# Altium PCB EFPR-HPTECH_V1.2.PcbDoc
Units mm, origin at the board's own origin, x right, y up, seen from the top; angles counter-clockwise.
Board outline 48 x 20 mm, 2 copper layers (Top Layer, Bottom Layer), stack 1.671 mm thick; 22 components, 14 nets, 79 pads, 26 vias.
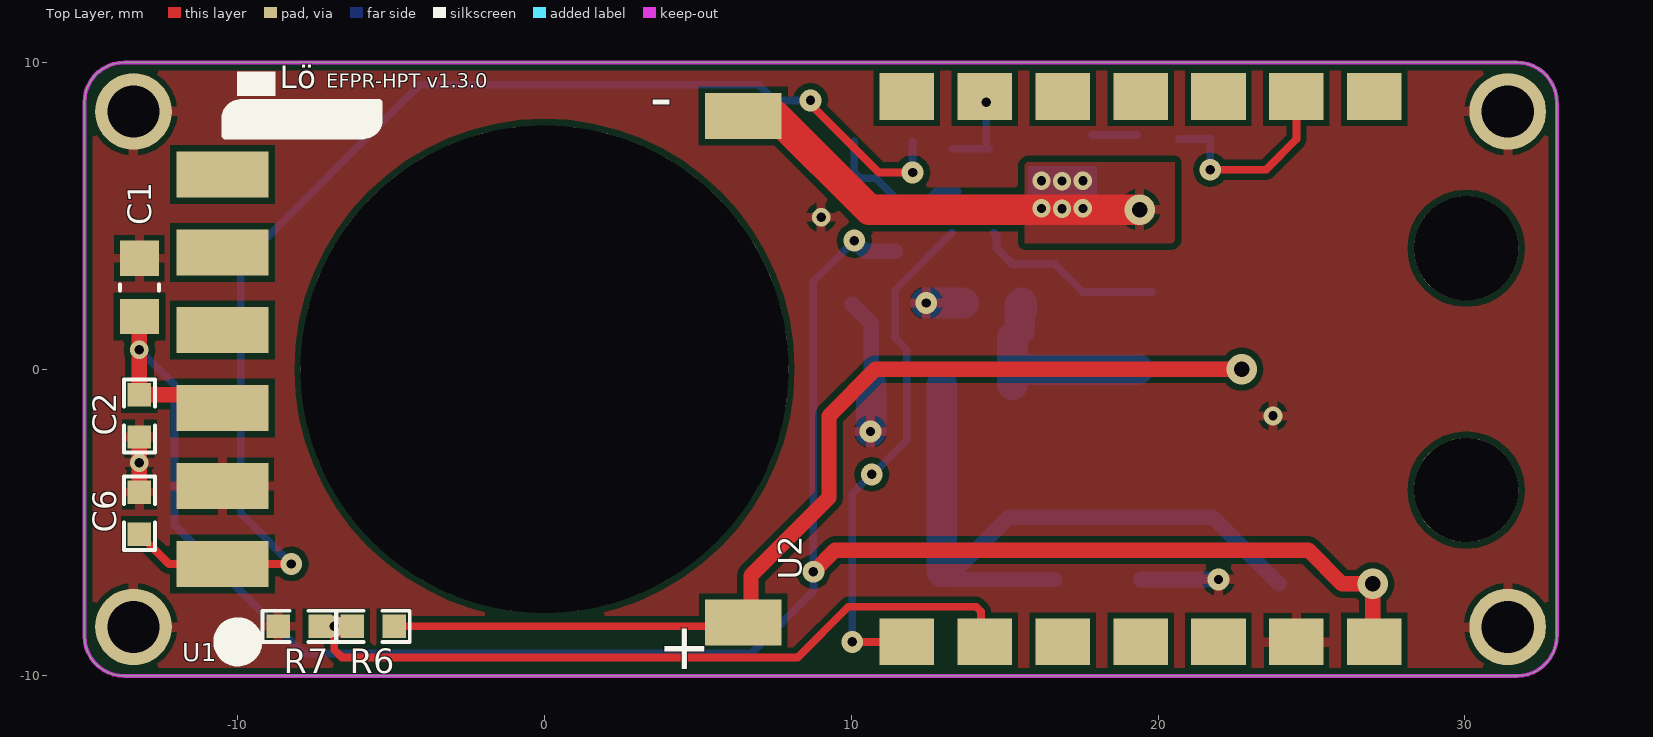
[diagram p0: Top Layer view]
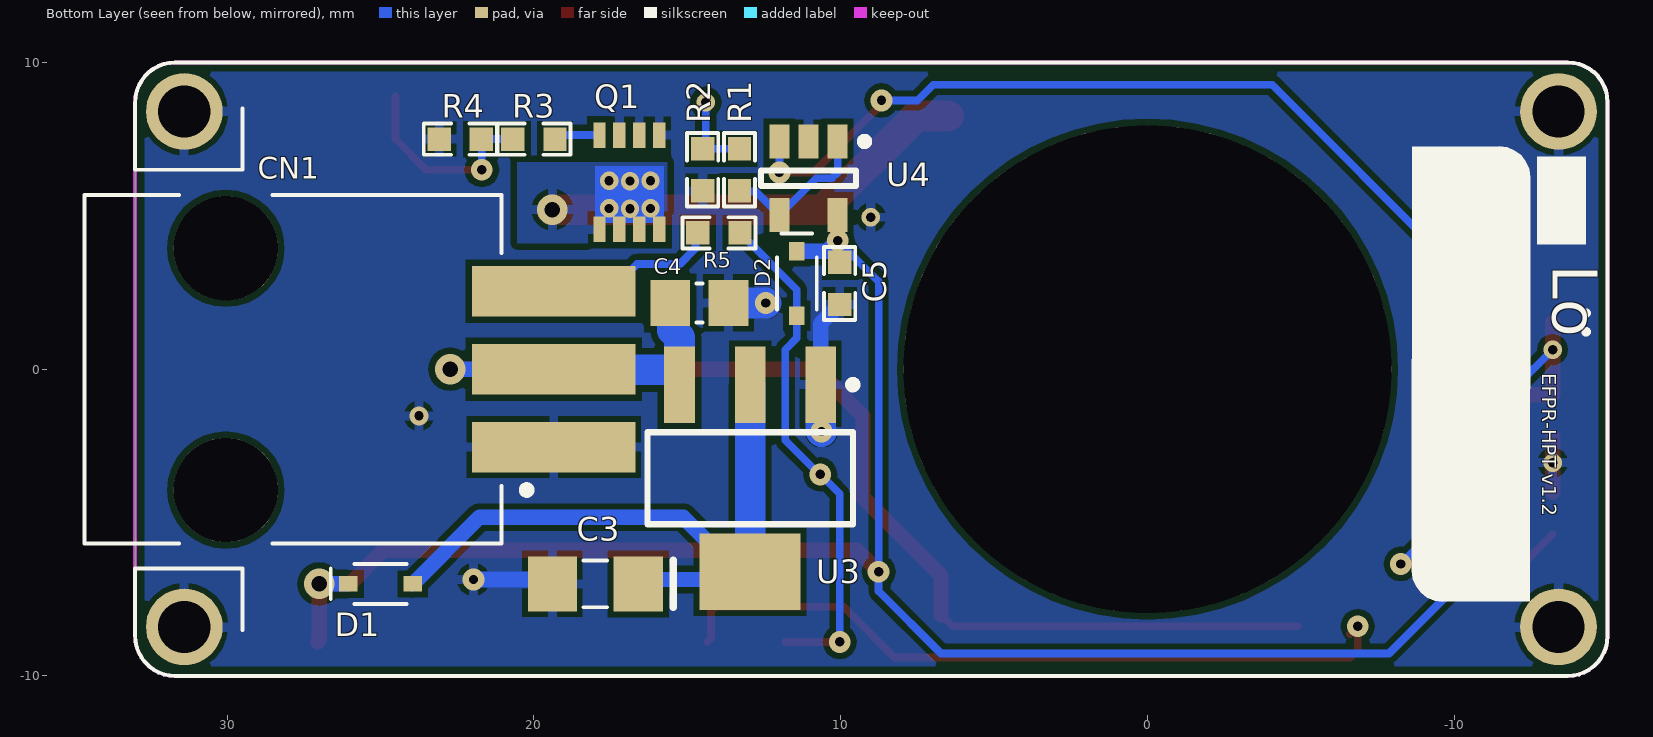
[diagram p1: Bottom Layer view, seen from below]

## Layer stack, top to bottom
Top Solder: solder mask 0.0102, Solder Resist, Dk 3.5
Top Layer: signal copper 0.0356
Dielectric1: core 1.6, FR-4, Dk 4.8
Bottom Layer: signal copper 0.0356
Bottom Solder: solder mask 0.0102, Solder Resist, Dk 3.5

## Board outline
-15,-8.7 -15,8.7 cw(c-13.7,8.7) -13.7,10 31.7,10 cw(c31.7,8.7) 33,8.7 33,-8.7 cw(c31.7,-8.7) 31.7,-10 -13.7,-10 cw(c-13.7,-8.7)

## Design rules (kind name [scope] priority, off if disabled: settings)
AssemblyTestPointUsage AssemblyTestPointUsage_1 [All] p2:
AssemblyTestpoint AssemblyTestpoint_1 [All] p2: testpointundercomponent=TRUE minsize=1.016 maxsize=2.54 preferedsize=1.524 minholesize=0 maxholesize=1.016 preferedholesize=0.813 testpointgrid=0.025 usegrid=TRUE gridtolerance=0 allowsidetop=TRUE allowsidebottom=TRUE
Clearance [All] p1: gap=0.254 ignorepadtopadclearanceinfootprint=FALSE except(0: Arc-Hole Track-Hole SMDPad-Hole THPad-Hole Via-Hole Fill-Hole Poly-Hole Region-Hole Text-Hole)
Clearance Clearance_1 [All] p2: gap=0.203 ignorepadtopadclearanceinfootprint=FALSE except(0: Arc-Hole Track-Hole SMDPad-Hole THPad-Hole Via-Hole Fill-Hole Poly-Hole Region-Hole Text-Hole)
ComponentClearance ComponentClearance_1 [All] p2: gap=0.254 collisioncheckmode=3 verticalgap=0.127 showdistances=FALSE
DiffPairsRouting DiffPairsRouting_1 [All] p2: maxlimit=0.254 minlimit=0.254 mostfreqgap=0.254 substack1={D5762E63-DB88-466C-98AF-6A9979C3AA1B} toplayer_{d5762e63-db88-466c-98af-6a9979c3aa1b}_minwidth=0.381 toplayer_{d5762e63-db88-466c-98af-6a9979c3aa1b}_maxwidth=0.381 toplayer_{d5762e63-db88-466c-98af-6a9979c3aa1b}_prefwidth=0.381 bottomlayer_{d5762e63-db88-466c-98af-6a9979c3aa1b}_minwidth=0.381 bottomlayer_{d5762e63-db88-466c-98af-6a9979c3aa1b}_maxwidth=0.381 bottomlayer_{d5762e63-db88-466c-98af-6a9979c3aa1b}_prefwidth=0.381 toplayer_minwidth=0.381 toplayer_maxwidth=0.381 toplayer_prefwidth=0.381 bottomlayer_minwidth=0.381 bottomlayer_maxwidth=0.381 bottomlayer_prefwidth=0.381 maxuncoupledlength=12.7
FabricationTestPointUsage FabricationTestPointUsage_1 [All] p2: valid=0 allowmultiple=FALSE
FabricationTestpoint FabricationTestpoint_1 [All] p2: side=3 testpointundercomponent=TRUE minsize=1.016 maxsize=2.54 preferedsize=1.524 minholesize=0 maxholesize=1.016 preferedholesize=0.813 testpointgrid=0.025 allowsidetop=TRUE allowsidebottom=TRUE usegrid=TRUE gridtolerance=0
FanoutControl Fanout_LCC [IsLCC] p1: bgadir=Out bgaviamode=Centered fanoutstyle=Auto fanoutdirection=Alternating viagrid=0.025 // Fanout_LCC (Default Rule)
FanoutControl Fanout_BGA [IsBGA] p2: bgadir=Out bgaviamode=Centered fanoutstyle=Auto fanoutdirection=Alternating viagrid=0.025 // Fanout_BGA (Default Rule)
FanoutControl Fanout_Small [(CompPinCount < 5)] p3: bgadir=Out bgaviamode=Centered fanoutstyle=Auto fanoutdirection=OutThenIn viagrid=0.025 // Fanout_Small (Default Rule)
FanoutControl Fanout_SOIC [IsSOIC] p4: bgadir=Out bgaviamode=Centered fanoutstyle=Auto fanoutdirection=Alternating viagrid=0.025 // Fanout_SOIC (Default Rule)
FanoutControl Fanout_BGA_1 [IsBGA] p6: bgadir=Out bgaviamode=Centered fanoutstyle=Auto fanoutdirection=Alternating viagrid=0.025 // Fanout_BGA (Default Rule)
FanoutControl Fanout_LCC_1 [IsLCC] p7: bgadir=Out bgaviamode=Centered fanoutstyle=Auto fanoutdirection=Alternating viagrid=0.025 // Fanout_LCC (Default Rule)
FanoutControl Fanout_SOIC_1 [IsSOIC] p8: bgadir=Out bgaviamode=Centered fanoutstyle=Auto fanoutdirection=Alternating viagrid=0.025 // Fanout_SOIC (Default Rule)
FanoutControl Fanout_Small_1 [(CompPinCount < 5)] p9: bgadir=Out bgaviamode=Centered fanoutstyle=Auto fanoutdirection=OutThenIn viagrid=0.025 // Fanout_Small (Default Rule)
FanoutControl Fanout_Default_1 [All] p10: bgadir=Out bgaviamode=Centered fanoutstyle=Auto fanoutdirection=Alternating viagrid=0.025 // Fanout_Default (Default Rule)
Height Height_1 [All] p2: minheight=0 maxheight=25.4 prefheight=12.7
HoleSize HoleSize_1 [All] p2: absolutevalues=TRUE maxlimit=2.54 minlimit=0.025 maxpercent=80.000 minpercent=20.000
HoleToHoleClearance HoleToHoleClearance_1 [All] p2: gap=0.254 allowstackedmicrovias=TRUE
LayerPairs LayerPairs_1 [All] p2: enforce=TRUE
MinimumSolderMaskSliver MinimumSolderMaskSliver_1 [All] p2: minsoldermaskwidth=0.254
NetAntennae NetAntennae_1 [All] p2: netantennaetolerance=0
PasteMaskExpansion PasteMaskExpansion_1 [All] p2: expansion=0
PlaneClearance PlaneClearance_1 [All] p2: clearance=0.508
PlaneConnect PlaneConnect_1 [All] p2: planeconnectstyle=Direct reliefexpansion=0.508 reliefentries=4 reliefconductorwidth=0.254 reliefairgap=0.254
PolygonConnect [All] p1: connectstyle=Relief reliefconductorwidth=0.254 reliefentries=4 polygonreliefangle="90 Angle" airgapwidth=0.254
PolygonConnect PolygonConnect_1 [All] p2: connectstyle=Relief reliefconductorwidth=0.305 reliefentries=4 polygonreliefangle="90 Angle" airgapwidth=0.178
RoutingCorners RoutingCorners_1 [All] p2: cornerstyle=45-Degree minsetback=2.54 maxsetback=2.54
RoutingLayers RoutingLayers_1 [All] p2: top layer_v5=TRUE bottom layer_v5=TRUE
RoutingPriority RoutingPriority_1 [All] p2: routingpriority=0
RoutingTopology RoutingTopology_1 [All] p2: topology=Shortest
RoutingVias [All] p1: holewidth=0.711 width=1.27 viastyle="Through Hole" minholewidth=0.711 minwidth=1.27 maxholewidth=0.711 maxwidth=1.27
RoutingVias RoutingVias_1 [All] p2: holewidth=0.305 width=0.711 viastyle="Through Hole" minholewidth=0.305 minwidth=0.711 maxholewidth=0.305 maxwidth=0.711
ShortCircuit ShortCircuit_1 [All] p2: allowed=FALSE
SilkToBoardRegionClearance SilkToBoardRegionClearance_1 [All] p2:
SilkToSilkClearance SilkToSilkClearance_1 [All] p2: silktosilkclearance=0.254
SilkToSolderMaskClearance SilkToSolderMaskClearance_1 [IsPad] p2: minsilkscreentomaskgap=0.254 clearancetoexposedcopper=TRUE
SolderMaskExpansion [All] p1: expansion=0.102 istentingtop=FALSE
SolderMaskExpansion SolderMaskExpansion_1 [All] p2: expansion=0.102 istentingtop=FALSE
UnRoutedNet UnRoutedNet_1 [All] p2:
UnpouredPolygon UnpouredPolygon_1 [All] p2:
Width [All] p1: maxlimit=0.254 minlimit=0.254 preferedwidth=0.254
Width Width_1 [All] p2: maxlimit=1.27 minlimit=0.254 preferedwidth=0.254 substack1={D5762E63-DB88-466C-98AF-6A9979C3AA1B}
26 further rules are at their usual default settings.

## Components (designator, comment, footprint, x,y, rotation, side; value= is the part's Value field where it differs from the comment)
C1 "1uF" 0805S -13.208,2.667 r270 top
C2 "0.01uF" 0603s -13.208,-1.524 r90 top
C3 "22uF 10V" C1206 18,-7 r0 bottom
C4 "10uF 16V" C0805NP 14.605,2.159 r0 bottom
C5 "0.1uF" 0603s 10.033,2.794 r90 bottom
C6 "470pF" 0603s -13.208,-4.699 r270 top
CN1 "1719770003" 1719770003 24.7,0 r270 bottom locked
D1 "*" SOD323_SC76 25,-7 r0 bottom
D2 "*" SOD323_SC76 11.43,2.794 r90 bottom
"EFPR-HPT v1.2" "Lo_PCB_Name_15mm" "Logo_Lo_PCB_Name _15mm" -8.636,7.239 r270 bottom
Q1 "BUK9M15-40HX" SOT1210 16.891,6.096 r0 bottom
R1 "2K2" 0603s 13.3,6.5 r90 bottom
R2 "3K3" 0603s 14.5,6.5 r270 bottom
R3 "100R" 0603s 20,7.5 r180 bottom
R4 "10K" 0603s 22.4,7.5 r180 bottom
R5 "10K" 0603s 13.97,4.445 r0 bottom
R6 "40.2K 0.1%" 0603s -5.588,-8.382 r180 top
R7 "10.2K 0.1%" 0603s -8.001,-8.382 r0 top
U1 "MPX5700D" MPX5700D 0,0 r270 top
U2 "SEEDUINO XIAO" SEEDUINO_XIAO 19.431,0 r270 top locked
U3 "LM1117-5" SOT223_REG 12.954,-3.556 r270 bottom
U4 "TLV171" SOT23-5 11.049,6.223 r270 bottom

## Footprints (in the part's own frame and the unit in brackets; to place one, negate y for a bottom-side part, rotate by r counter-clockwise, add the part's x,y. Pads: shape width x height; smd on the part's side, far side on the other; paste and mask are expansions set on the pad)
0603s [mil] "Chip Resistor; Body 1.6 x 0.8 mm (LxW typ); Small"
  rect 30x30 smd: 1(-27,0) 2(27,0)
  silkscreen extent -47,-20 47,20, body extent -30,-15 30,15, height 20
0805S [mm] "Chip Resistor; Body 2.0 x 1.2 mm (LxW typ); Small"
  rect 1.143x1.27 smd: 1(-0.95,0) 2(0.95,0)
  silkscreen extent -0.1,-0.64 0.1,0.64, body extent -1.02,-0.64 1.02,0.64, height 1
1719770003 [mm] "CONN HEADER SMD R/A 3POS 2.54MM"
  rect 1.65x5.33 smd mask+0.076: 1(2.54,5.345) 2(0,5.345) 3(-2.54,5.345)
  round 3.4 hole 3.4 unplated mask+0.076: ""(-3.94,-5.345) ""(3.94,-5.345)
  silkscreen extent -5.68,-9.95 5.68,4.59, body extent -5.68,-9.95 5.68,7.19, height 9.46
C0805NP [mm] "Chip Capacitor; Body 2.0 x 1.2 mm (LxW typ)"
  rect 1.3x1.5 smd: 1(-0.95,0) 2(0.95,0)
  silkscreen extent -0.1,-0.64 0.1,0.64, body extent -1,-0.6 1,0.6, height 1.2
C1206 [mm] "Chip Capacitor; Body 3.2 x 1.6 mm (LxW typ)"
  rect 1.6x1.8 smd: 1(-1.4,0) 2(1.4,0)
  silkscreen extent -2.54,-0.76 0.38,0.76, body extent -1.65,-0.76 1.65,0.76, height 1.8
"Logo_Lo_PCB_Name _15mm" [mm]
  silkscreen extent -0.02,-0.01 14.82,5.69
MPX5700D [mm]
  rect 1.5x3 smd: 1(6.35,-10.5) 2(3.81,-10.5) 3(1.27,-10.5) 4(-1.27,-10.5) 5(-3.81,-10.5) 6(-6.35,-10.5)
  silkscreen extent 8.49,-10.4 9.29,-9.6, body extent -8.51,-10.74 8.51,8.51, height 3
SEEDUINO_XIAO [mil]
  rect 60x70 smd: 1(-350,300) 2(-350,200) 3(-350,100) 4(-350,0) 5(-350,-100) 6(-350,-200) 7(-350,-300) 8(350,-300) 9(350,-200) 10(350,-100) 11(350,0) 12(350,100) 13(350,200) 14(350,300)
  body extent -350,-417 350,469, height 170
SOD323_SC76 [mm]
  rect 0.6x0.5 smd: A(-1.05,0) K(1.05,0)
  silkscreen extent -0.85,-0.65 1.63,0.65, body extent -1.25,-0.65 1.25,0.65, height 1.1
SOT23-5 [mm] "SOT23, 5-Leads, Body 2.9x1.6mm, Pitch 0.95mm, Lead Span 2.8mm"
  rect 1.1x0.65 smd: 1(-1.2,0.95) 2(-1.2,0) 3(-1.2,-0.95) 4(1.2,-0.95) 5(1.2,0.95)
  silkscreen extent -1.32,-1.55 0.25,1.95, body extent -0.9,-1.55 0.9,1.55, height 1.45
SOT223_REG [mm] "SOT223, 3-Leads, Body 6.5x3.5mm, Pitch 2.3mm, Lead Span 7mm, IPC Low Density"
  rect 2.5x1 smd: 1(-3.05,2.3) 2(-3.05,0) 3(-3.05,-2.3)
  rect 2.5x3.3 smd: 2(3.05,0)
  silkscreen extent -3.17,-3.35 1.5,3.47, body extent -1.85,-3.35 1.85,3.35, height 1.8
SOT1210 [mm] "LFPAK33; 0.65mm Pitch;"
  rect 0.4x0.83 smd mask+0.05: D(-0.975,1.535) D(-0.325,1.535) D(0.325,1.535) D(0.975,1.535) G(0.975,-1.535) S(-0.975,-1.535) S(-0.325,-1.535) S(0.325,-1.535)
  Top Layer region: -1.125,1.33 1.125,1.33 1.125,-0.52 -1.125,-0.52
  body extent -1.55,-1.3 1.55,1.3, height 0.9

## Part data
C1 C2 C4 C5 C6: library part "Cap Semi", "Small Capacitor"
C3: library part "Cap Pol", "Pol. Capacitor"
CN1: "CONN HEADER SMD R/A 3POS 2.54MM"
D1 D2: library part DIODE_STD, "Standard Diode"
"EFPR-HPT v1.2": library part Lö_PCB_Name_15mm, "Lö_PCB_Name_15mm"
Q1: library part "Power N-MOSFET", "N-Channel MOSFET", PartNumber=BUK9M15-40HX
R1 R2 R3 R4 R5 R6 R7: library part RES_SMD, "Resistor"
U2: library part SEEDUIONA_XIAO
U3: library part LDO_TAB, "Voltage Regulator (LDO); Output in Tab", PartNumber=LM1117-5
U4: library part OP_AMP1, "Single Operational Amplifier", PartNumber=TLV171
U1: PartNumber=MPX5700D

## Free pads (board coordinates)
  round 15.9 hole 15.9 unplated: 0(0,0)
  round 2.5 hole 1.7: 0(31.4,8.4) 1(31.4,-8.4) 2(-13.4,-8.4) 3(-13.4,8.4)
  rect 2.5x1.5 smd: 1(6.477,-8.255) 1(6.477,8.255)

## Via types
v1: diameter 0.711, hole 0.305, Top Layer to Bottom Layer, tented both sides, 12 vias
v2: diameter 0.6, hole 0.3, Top Layer to Bottom Layer, tented top, 6 vias
v3: diameter 0.61, hole 0.305, Top Layer to Bottom Layer, tented both sides, 4 vias
v4: diameter 1, hole 0.5, Top Layer to Bottom Layer, tented both sides, 3 vias
v5: diameter 0.6, hole 0.3, Top Layer to Bottom Layer, tented both sides, 1 vias

## Nets (pads, with @x,y where several pads share a name; then routed paths per layer and width w, separated by ;. In a path a pad name is that pad's centre, name@x,y a point inside that pad or via, vN(x,y) a via of type N, cw(c..) or ccw(c..) an arc to the next point about the centre after c; other vN are vias at no path point)
3V3: U2.12
5V: C1.2 C2.2 C5.2 D1.K D2.K U1.3 U2.14 U4.5 | length 70.1
  Top Layer w0.5: v1(8.763,-6.604) 9.467,-5.9 24.9,-5.9 26,-7 v4(27,-7) 27,-8.839 U2.14
  Top Layer w0.508: C1.2@-13.208,1.524 C2.2 -11.608,-0.838 -11.176,-1.27 U1.3
  Bottom Layer w0.254: v1(8.763,-6.604) 8.763,2.855 v1(10.099,4.191)
  Bottom Layer w0.256: v3(-13.208,0.635) -12.065,-0.508 -12.065,-5.08 -7.874,-9.271 6.731,-9.271 8.763,-7.239 v1(8.763,-6.604)
  Bottom Layer w0.5: D1.K v4(27,-7)
  Bottom Layer w0.508: v1(10.099,4.191) 10.446,3.844 D2.K
DP_SENSE: R1.2 R2.1 U2.6 | length 2.6
  Bottom Layer w0.254: R1.2 R2.1 ; R2.1@14.4,7.286 v5(14.4,8.7)
ENABLE_IN: CN1.3 R5.2 | length 6.2
  Bottom Layer w0.254: R5.2 14.732,4.369 14.732,3.937 15.24,3.429 16.637,3.429 17.546,2.52 CN1.3@19.812,2.52
FP-_OUT: pad.1@6.477,8.255 Q1.D | length 14.2
  Top Layer w1: pad.1@6.477,8.255 7.532,8.255 10.587,5.2 v4(19.4,5.2)
  other v2: 16.2,5.24 16.87,5.23 17.55,5.24 16.87,6.13 16.2,6.14 17.55,6.14
GND: C1.1 C2.1 C3.2 C4.1 C5.1 C6.1 CN1.1 pad.0@31.4,8.4 pad.1@31.4,-8.4 pad.2 pad.3 Q1.S R2.2 R4.1 R7.1 U1.2 U2.13 U3.1 U4.2 | length 10
  Top Layer w0.508: C6.1 C2.1
  Bottom Layer w0.508: C5.1 10.654,1.487 U3.1 ; C3.2@19.434,-6.858 v1(21.971,-6.858)
  Bottom Layer w1: v1(10.625,-2.032) 10.654,-2.003 U3.1
  Bottom Layer w1.016: v1(12.446,2.159) C4.1
  other v3: -13.208,-3.048 23.749,-1.524 9.017,4.953
NetC3_1: C3.1 D1.A U3.2 | length 22.5
  Bottom Layer w0.254: U3.2@13.206,-6.858 12.954,-6.606 U3.2@13.354,-6.606
  Bottom Layer w0.5: U3.2@13.206,-6.858 C3.1@16.634,-6.858 ; U3.2@13.354,-6.606 15.134,-4.826 21.776,-4.826 D1.A
  Bottom Layer w1: U3.2@12.954,-6.606 U3.2@12.954,-0.506
NetD2_A: D2.A R5.1 U2.8 | length 16.8
  Top Layer w0.254: v1(10.033,-8.89) U2.8
  Bottom Layer w0.254: v1(10.033,-8.89) 10.033,-4.064 v1(10.668,-3.429) 10.699,-3.429 11.811,-2.317 11.811,0.635 11.43,1.016 D2.A 11.43,2.591 R5.1
NetQ1_1: Q1.G R3.2 | length 1.4
  Bottom Layer w0.254: Q1.G R3.2@19.314,7.631
NetR1_1: R1.1 U4.1 U4.4 | length 5.3
  Bottom Layer w0.254: U4.1 10.099,6.411 10.287,6.223 10.799,6.223 U4.4 12.767,5.791 R1.1@13.462,5.791
PWM_OUT: R3.1 R4.2 U2.2 | length 6.6
  Top Layer w0.254: v1(21.7,6.5) 23.518,6.5 24.511,7.493 U2.2
  Bottom Layer w0.254: R3.1 R4.2 ; v1(21.7,6.5) R4.2@21.7,7.486
V_IN: C4.2 CN1.2 pad.1@6.477,-8.255 R6.1 U3.3 | length 43.6
  Top Layer w0.254: R6.1 6.35,-8.382 pad.1@6.731,-8.001
  Top Layer w0.5: pad.1@6.731,-8.001 6.731,-6.731 9.271,-4.191 9.271,-1.524 10.795,0 v4(22.733,0)
  Bottom Layer w0.254: CN1.2 CN1.2@19.832,0
  Bottom Layer w0.5: CN1.2@19.832,0 v4(22.733,0)
  Bottom Layer w1: U3.3 15.254,1.03 15.494,1.27 15.494,2.098 C4.2 C4.2@15.555,1.905 ; U3.3@15.627,-0.02 19.335,-0.02 CN1.2
V_IN_SENSE: R6.2 R7.2 U2.9 | length 24.1
  Top Layer w0.254: R6.2@-6.604,-8.636 v1(-6.858,-8.382) -6.858,-9.144 -6.604,-9.398 8.255,-9.398 9.906,-7.747 14.075,-7.747 14.224,-7.896 14.224,-8.763 U2.9
VOUT: C6.2 U1.1 U4.3 | length 42.4
  Top Layer w0.254: C6.2 -12.243,-6.35 U1.1 v1(-8.255,-6.35) ; v1(8.672,8.763) 8.672,8.639 10.9,6.411 v1(11.999,6.411)
  Bottom Layer w0.254: v1(-8.255,-6.35) -9.906,-4.699 -9.906,3.429 -4.064,9.271 6.985,9.271 7.493,8.763 v1(8.672,8.763) ; v1(11.999,6.411) U4.3
pads on no net: CN1. U1.4 U1.5 U1.6 U2.1 U2.3 U2.4 U2.5 U2.7 U2.10 U2.11

## Polygon pours and split planes (outlines as drawn)
FP-_OUT on Top Layer "TOP-FP-_OUT" (solid, remove dead copper, pour order 13): 15.65,4.103 20.55,4.1 20.55,6.75 15.65,6.75
GND on Top Layer "TOP-GND" (solid, remove dead copper, pour order 2): -15,-8.7 ccw(c-13.7,-8.7) -13.7,-10 31.7,-10 ccw(c31.7,-8.7) 33,-8.7 33,8.7 ccw(c31.7,8.7) 31.7,10 -13.7,10 ccw(c-13.7,8.7) -15,8.7
FP-_OUT on Bottom Layer "BOTTOM-FP-_OUT" (solid, remove dead copper, pour order 7): 15.65,4.1 20.55,4.1 20.55,6.75 15.65,6.75
GND on Bottom Layer "BOTTOM-GND" (solid, remove dead copper, pour order 5): -15,-8.7 ccw(c-13.7,-8.7) -13.7,-10 31.7,-10 ccw(c31.7,-8.7) 33,-8.7 33,8.7 ccw(c31.7,8.7) 31.7,10 -13.7,10 ccw(c-13.7,8.7) -15,8.7

## Keep-outs
Keep-Out Layer:
  the board outline again, w0.127

## Silkscreen, mask and mechanical layers (free items; w line width, h text height)
Top Overlay:
  region: -8.774,9.711 -10.024,9.711 -10.024,8.904 -8.774,8.904
  region: -5.461,8.614 -10.294,8.614 -10.294,7.747 -5.461,7.747
  lines w0.254: -10.404,7.62 -5.912,7.62 -5.894,7.638 ccw(c-5.894,8.128) -5.404,8.128 -5.404,8.674 -9.904,8.674 ; -10.404,7.62 -10.404,7.62 ; -10.404,7.62 -10.404,8.184 cw(c-9.909,8.179) -9.904,8.674 ; -9.904,8.674 -9.904,8.674
  text "EFPR-HPT v1.3.0" at -7.112,9.017 h0.8
  text "Lö" at -8.634,8.914 h1.27
  text "-" at 3.429,8.128 h1.52
  text "+" at 3.683,-9.779 h1.52
Bottom Overlay:
  lines w0.127: 29.5,-8.5 29.5,-6.5 33,-6.5 33,-8.7 cw(c31.7,-8.7) 31.7,-10 -13.7,-10 cw(c-13.7,-8.7) -15,-8.7 -15,8.7 cw(c-13.7,8.7) -13.7,10 31.7,10 cw(c31.7,8.7) 33,8.7 33,6.5 29.5,6.5 29.5,8.5
Mechanical 1:
  lines w0.127: -15,-8.7 ccw(c-13.7,-8.7) -13.7,-10 31.7,-10 ccw(c31.7,-8.7) 33,-8.7 33,8.7 ccw(c31.7,8.7) 31.7,10 -13.7,10 ccw(c-13.7,8.7) -15,8.7 -15,-8.7 ; -13.4,-9.25 cw(c-13.4,-8.4) -12.55,-8.4 -13.4,-8.4 -13.4,-9.25 ; -13.4,7.55 cw(c-13.4,8.4) -12.55,8.4 -13.4,8.4 -13.4,7.55 ; 0,-8.5 cw(c0,0) 8.5,0 0,0 0,-8.5 ; 31.4,-9.25 cw(c31.4,-8.4) 32.25,-8.4 31.4,-8.4 31.4,-9.25 ; 31.4,7.55 cw(c31.4,8.4) 32.25,8.4 31.4,8.4 31.4,7.55
Drill Drawing:
  circle w0.127: c-13.4,-8.4 r1.5
  circle w0.127: c-13.4,8.4 r1.5
  circle w0.127: c31.4,8.4 r1.5
  circle w0.127: c31.4,-8.4 r1.5

## Text inside footprints (layer, text, board x,y; h text height)
"EFPR-HPT v1.2": Bottom Overlay "Lo" at -12.725,3.404 h2.5 r90